# EAGLE board broken-sensor-ctrl (EAGLE 4.16)
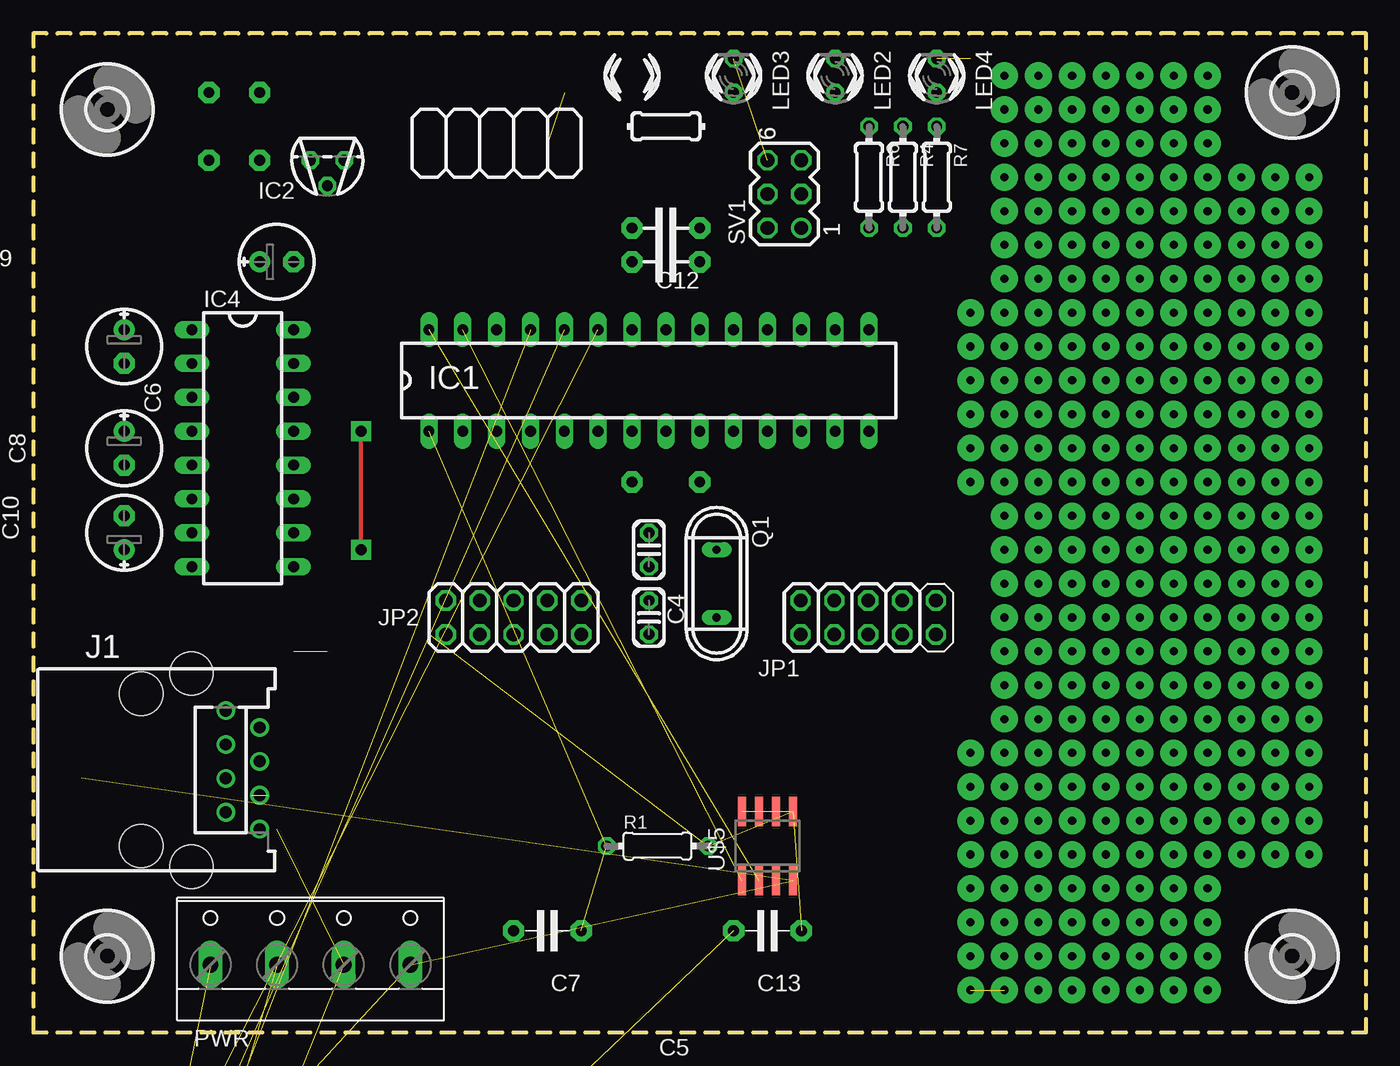
[diagram p0: board, top side]
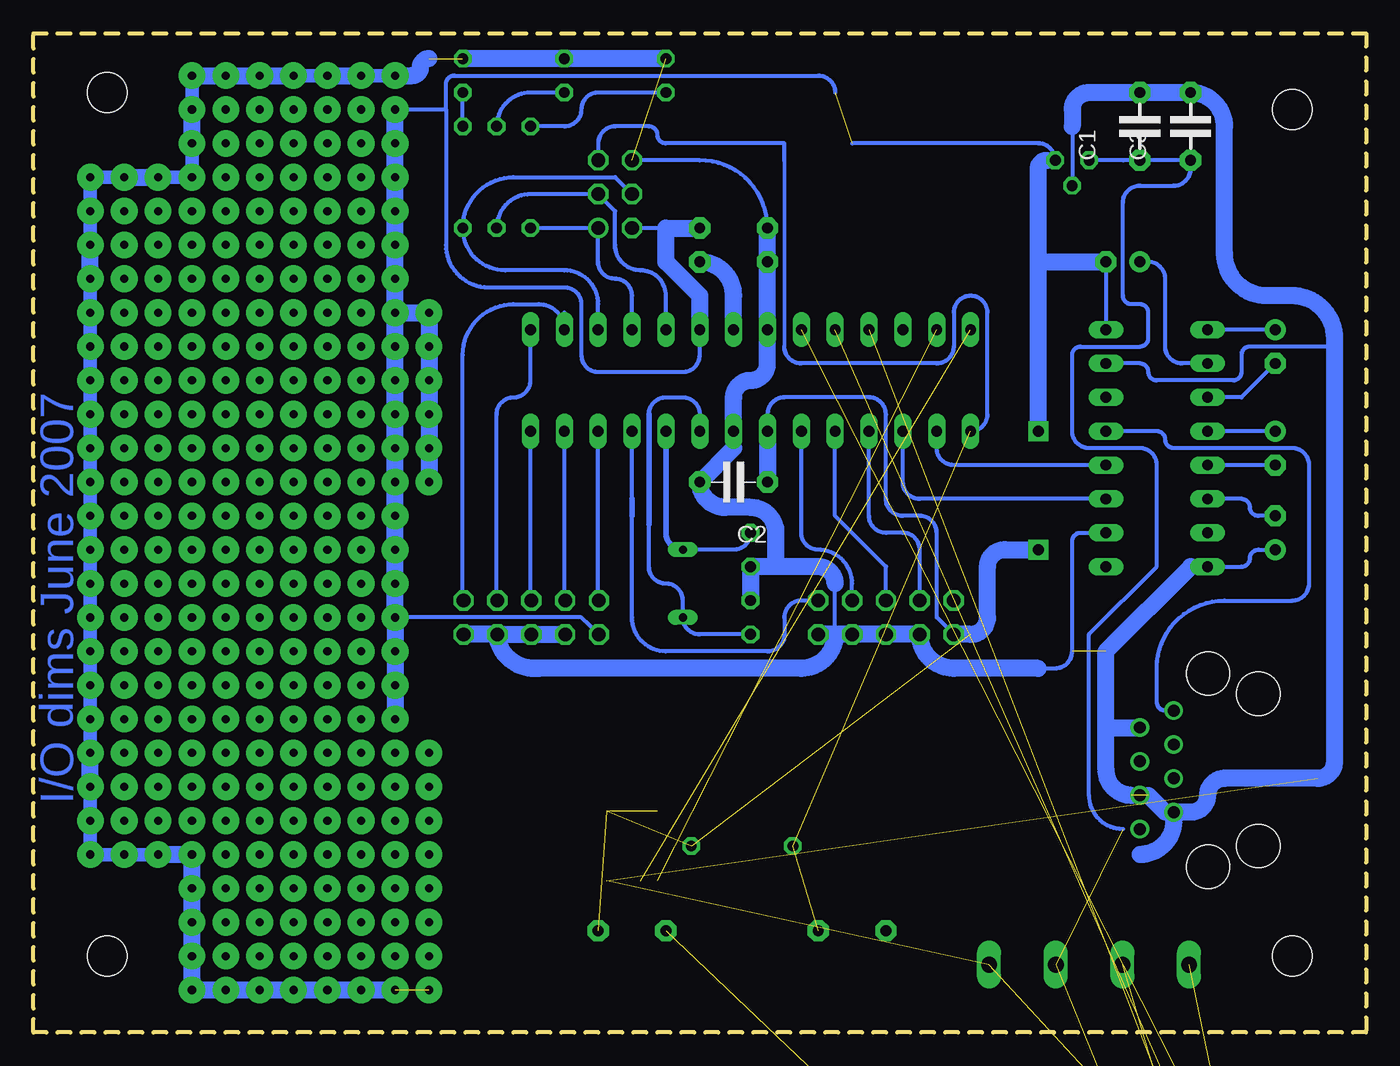
[diagram p1: board, bottom side, seen from below]

Size 100 x 74.92 mm. Coordinates in mm from the lower left corner, seen from the top.
Outline: 0,0 100,0 100,74.92 0,74.92 0,0
Copper layers (1*16): Top 0.035mm / dielectric 1.5mm / Bottom 0.035mm
Design rules "10mils": minimum track width 10mil, minimum drill 24mil, track to track 10mil, track to pad 10mil, pad to pad 10mil, via to via 10mil, smd to smd 10mil, copper to edge 40mil, drill to drill 10mil, minimum pad ring 10mil, minimum via ring 8mil, stop-mask expansion 0mil, vias tented up to drill 0mil, thermal gap 10mil
Holes 3.25 mm at 11.87,26.91 11.87,12.42

## Footprints (pad centres in the part's own frame; a part is rotated, then mirrored left to right if it is on the bottom)
C-5 = drill 0.813 pad 1.6 octagon: 1 -2.54,0; 2 2.54,0
C025-024X044 = drill 0.813 octagon: 1 -1.27,0; 2 1.27,0
E2,5-6E = drill 0.813 pad 1.575 round: + -1.27,0 | drill 0.813 pad 1.575 octagon: - 1.27,0
DIL28-3 = drill 0.813 long: 1 -16.51,-3.81; 2 -13.97,-3.81; 3 -11.43,-3.81; 4 -8.89,-3.81; 5 -6.35,-3.81; 6 -3.81,-3.81; 7 -1.27,-3.81; 8 1.27,-3.81; 9 3.81,-3.81; 10 6.35,-3.81; 11 8.89,-3.81; 12 11.43,-3.81; 13 13.97,-3.81; 14 16.51,-3.81; 15 16.51,3.81; 16 13.97,3.81; 17 11.43,3.81; 18 8.89,3.81; 19 6.35,3.81; 20 3.81,3.81; 21 1.27,3.81; 22 -1.27,3.81; 23 -3.81,3.81; 24 -6.35,3.81; 25 -8.89,3.81; 26 -11.43,3.81; 27 -13.97,3.81; 28 -16.51,3.81
TO92 = drill 0.813 octagon: 1 -1.27,0; 2 0,1.905; 3 1.27,0
DIL16 = drill 0.813 long: 1 -8.89,-3.81; 2 -6.35,-3.81; 3 -3.81,-3.81; 4 -1.27,-3.81; 5 1.27,-3.81; 6 3.81,-3.81; 7 6.35,-3.81; 8 8.89,-3.81; 9 8.89,3.81; 10 6.35,3.81; 11 3.81,3.81; 12 1.27,3.81; 13 -1.27,3.81; 14 -3.81,3.81; 15 -6.35,3.81; 16 -8.89,3.81
215877-4 = drill 0.889 round: 1 -4.445,6.35; 2 -3.175,8.89; 3 -1.905,6.35; 4 -0.635,8.89; 5 0.635,6.35; 6 1.905,8.89; 7 3.175,6.35; 8 4.445,8.89 | hole 3.251: -5.715,0; 5.715,0
2X05 = drill 1.016 octagon: 1 -5.08,-1.27; 2 -5.08,1.27; 3 -2.54,-1.27; 4 -2.54,1.27; 5 0,-1.27; 6 0,1.27; 7 2.54,-1.27; 8 2.54,1.27; 9 5.08,-1.27; 10 5.08,1.27
LED3MM = drill 0.813 octagon: A -1.27,0; K 1.27,0
W237-4 = drill 1.194 long: 1 -7.5,-1.27; 2 -2.5,-1.27; 3 2.5,-1.27; 4 7.5,-1.27
QS = drill 0.61 long: 1 -2.54,0; 2 2.54,0
0204/7 = drill 0.813 octagon: 1 -3.81,0; 2 3.81,0
MA03-2 = drill 1.016 round: 1 -2.54,-1.27 | drill 1.016 octagon: 2 -2.54,1.27; 3 0,-1.27; 4 0,1.27; 5 2.54,-1.27; 6 2.54,1.27
3,0 = hole 3: 0,0
SO8 = smd 0.6 x 2.2: 1 -1.905,-2.6; 2 -0.635,-2.6; 3 0.635,-2.6; 4 1.905,-2.6; 5 1.905,2.6; 6 0.635,2.6; 7 -0.635,2.6; 8 -1.905,2.6

## Placement (x,y rotation side)
C1  100nF  [C-5]  16.98,67.94 90 bottom
C2  100nF  [C-5]  47.46,41.27 180 bottom
C3  10uF  [C-5]  13.17,67.94 90 bottom
C4  12pF  [C025-024X044]  46.19,31.11 270 top
C5  12pF  [C025-024X044]  46.19,36.19 90 top
C6  1uF  [E2,5-6E]  6.82,51.43 270 top
C7  100nF  [C-5]  38.57,7.62 180 top
C8  1uF  [E2,5-6E]  6.82,43.81 270 top
C9  1uF  [E2,5-6E]  18.25,57.78 0 top
C10  1uF  [E2,5-6E]  6.82,37.46 90 top
C11  100nF  [C-5]  47.46,57.78 180 top
C12  100nF  [C-5]  47.46,60.32 180 top
C13  100nF  [C-5]  55.08,7.62 180 top
IC1  ATMEGA88-20P  [DIL28-3]  46.19,48.89 0 top
IC2  78L05Z  [TO92]  22.06,65.4 180 top
IC4  MAX232  [DIL16]  15.71,43.81 270 top
J1  [215877-4]  8.09,19.68 270 top
JP1  [2X05]  62.64,31.11 0 top
JP2  [2X05]  36.03,31.11 0 top
LED2  [LED3MM]  60.16,71.75 90 top
LED3  [LED3MM]  52.54,71.75 90 top
LED4  [LED3MM]  67.78,71.75 90 top
PWR  [W237-4]  20.79,6.34 0 top
Q1  20MHz  [QS]  51.27,33.65 270 top
R1  10k  [0204/7]  46.82,13.97 0 top
R2  2k  [0204/7]  -7.15,-37.47 0 top  (outside the outline)
R3  2k  [0204/7]  -7.15,-45.09 0 top  (outside the outline)
R4  330  [0204/7]  65.24,64.13 270 top
R5  2k  [0204/7]  -7.15,-52.71 0 top  (outside the outline)
R6  330  [0204/7]  62.7,64.13 270 top
R7  330  [0204/7]  67.78,64.13 270 top
R8  10k  [0204/7]  -7.15,-60.33 0 top  (outside the outline)
R9  10k  [0204/7]  -7.15,-67.95 0 top  (outside the outline)
R10  10k  [0204/7]  -7.15,-75.57 0 top  (outside the outline)
SV1  ISP6  [MA03-2]  56.35,62.86 90 top
U$1  [3,0]  5.55,5.71 0 top
U$2  [3,0]  5.55,69.21 0 top
U$3  [3,0]  94.45,70.48 0 top
U$4  [3,0]  94.45,5.71 0 top
U$5  LM75  [SO8]  55.08,13.97 0 top

## Library data of the parts
C1-C3 C7 C11-C13 = discrete
C4-C6 C8-C10 R1-R10 = rcl
IC1 = avr
IC2 = linear
IC4 = maxim
J1 = con-amp
JP1 JP2 = pinhead
LED2-LED4 = led
PWR = con-wago-500
Q1 = special
SV1 = con-lstb
U$1-U$4 = holes
U$5 = lm75

## Nets
+5V: C2.1 C9.- C12.1 C13.1 IC1.7 IC1.20 IC2.1 IC4.16 JP1.1 JP2.1 R1.2 SV1.2 U$5.5 U$5.6 U$5.7 U$5.8
GND: C1.2 C2.2 C3.2 C4.1 C5.1 C10.+ C11.2 C12.2 C13.2 IC1.8 IC1.22 IC2.2 IC4.8 IC4.10 IC4.15 J1.2 J1.7 JP1.3 JP1.5 JP1.7 JP1.9 JP2.3 JP2.5 JP2.7 JP2.9 LED2.K LED3.K LED4.K PWR.4 R2.1 R3.1 R5.1 SV1.6 U$5.4
HMM: IC1.17 R7.2 SV1.4
N$1: C7.1 IC1.1 R1.1 SV1.5
N$2: IC1.19 R4.2 SV1.3
N$3: IC1.18 R6.2 SV1.1
N$4: C5.2 IC1.10 Q1.1
N$5: IC1.2 IC4.12
N$6: IC1.3 IC4.11
N$7: C4.2 IC1.9 Q1.2
N$8: IC1.16 JP1.10
N$10: IC1.15 JP1.8
N$11: IC1.14 JP1.6
N$12: IC1.13 JP1.4
N$13: IC1.12 JP1.2
N$14: IC1.11 JP2.10
N$15: C9.+ IC4.2
N$16: C10.- IC4.6
N$17: C6.+ IC4.1
N$18: IC1.27 U$5.1
N$19: C6.- IC4.3
N$20: C8.- IC4.5
N$21: C8.+ IC4.4
N$22: C11.1 IC1.21
N$23: IC1.6 JP2.8
N$24: IC1.5 JP2.6
N$25: IC1.4 JP2.4
N$26: IC1.28 U$5.2
N$33: IC1.23 R2.2 R8.1
N$34: LED2.A R4.1
N$35: LED3.A R6.1
N$36: LED4.A R7.1
N$38: J1.8
N$65: IC1.24 R3.2 R9.1
N$66: IC1.25 R5.2 R10.1
N$67: C1.1 C3.1 IC2.3 PWR.3 R8.2
N$68: PWR.2 R9.2
N$69: PWR.1 R10.2
RX: IC4.13 J1.1

## Tracks (layer width: path | path; a pad name or v marks a point on that pad's centre or on a via)
+5V  (via drill 0.61 pad 2, 0.81 pad 1.5)  (7 unrouted)
  Top 0.3: v24.6,36.19 v24.6,45.08
  Bottom 0.3: C9.- IC4.16 | v72.86,69.21 69.05,69.21 | JP2.1 32.22,31.11 32.22,37.46 arc-90 33.49,38.73 34.76,38.73 arc90 36.03,40 36.03,46.35 arc-90 37.3,47.62 43.65,47.62 arc-90 44.92,46.35 IC1.7 | IC1.20 50,50.8 arc90 51.27,49.53 57.62,49.53 arc90 58.89,50.8 58.89,54.61 arc-90 60.16,55.88 65.88,55.88 arc90 69.05,59.05 69.05,69.21 | 69.05,69.21 69.05,71.11 arc90 68.41,71.75 41.11,71.75 arc90 39.84,70.48 | 38.57,66.67 24.6,66.67 arc90 IC2.1 23.96,65.4 | JP1.1 58.89,31.11 v72.86,31.11 | 52.54,60.32 SV1.2
  Bottom 1.27: v24.6,45.08 24.6,57.78 | 24.6,57.78 C9.- | IC1.7 C2.1 | v72.86,69.21 v72.86,66.67 v72.86,64.13 v72.86,61.59 v72.86,59.05 v72.86,56.51 v72.86,53.97 | v72.86,53.97 v72.86,51.43 v72.86,48.89 v72.86,46.35 v72.86,43.81 v72.86,41.27 v72.86,38.73 v72.86,36.19 v72.86,33.65 v72.86,31.11 v72.86,28.57 v72.86,26.03 v72.86,23.49 | JP2.1 29.68,29.84 arc-90 28.41,31.11 28.41,34.92 arc90 27.14,36.19 v24.6,36.19 | 23.96,65.4 arc-90 24.6,64.77 24.6,57.78 | v70.32,41.27 v70.32,43.81 v70.32,46.35 v70.32,48.89 v70.32,51.43 v70.32,53.97 v72.86,53.97 | C12.1 52.54,60.32 52.54,57.78 50,55.24 IC1.20
GND  (via drill 0.61 pad 2)  (11 unrouted)
  Bottom 0.3: 22.06,67.94 IC2.2 | J1.7 15.08,16.5 | 13.17,34.92 IC4.8 9.36,34.92 arc-90 8.73,35.55 arc90 8.09,36.19 C10.+ | IC4.15 16.98,50.16 arc90 16.34,49.53 arc-90 15.71,48.89 10,48.89 arc-90 9.36,49.53 9.36,50.8 arc90 8.73,51.43 2.38,51.43 | 39.84,29.84 39.84,33.65 | IC4.10 21.42,37.46 arc-90 22.06,36.83 22.06,28.57 arc90 23.33,27.3 24.6,27.3 | C12.2 arc-90 50,65.4 SV1.6
  Bottom 0.406: JP1.5 62.7,29.84 | 65.24,29.84 JP1.7 | 47.46,43.81 IC1.8
  Bottom 1: v90.64,13.33 v93.18,13.33 v95.72,13.33 v95.72,15.87 v95.72,18.41 | v95.72,59.05 v95.72,61.59 v95.72,64.13 v93.18,64.13 | v95.72,56.51 v95.72,53.97 v95.72,51.43 v95.72,48.89 v95.72,46.35 v95.72,43.81 v95.72,41.27 v95.72,38.73 v95.72,36.19 v95.72,33.65 v95.72,31.11 v95.72,28.57 v95.72,26.03 v95.72,23.49 v95.72,20.95 | v90.64,64.13 v88.1,64.13 v88.1,66.67 | v88.1,69.21 v88.1,71.75 | v75.4,71.75 v72.86,71.75 | v80.48,71.75 v77.94,71.75
  Bottom 1.27: 39.84,29.84 JP2.7 JP2.5 JP2.3 arc-90 30.95,27.3 24.6,27.3 | 39.84,29.84 JP2.9 | 65.24,29.84 JP1.9 | LED3.K LED2.K LED4.K | C12.2 C11.2 IC1.22 44.92,50.16 arc90 46.19,48.89 arc-90 47.46,47.62 IC1.8 | v72.86,71.75 71.59,71.75 arc-90 70.95,72.38 arc90 70.32,73.02 | C4.1 C5.1 44.28,34.92 | v77.94,71.75 v75.4,71.75 | v88.1,66.67 v88.1,69.21 | v90.64,13.33 v88.1,13.33 v88.1,10.79 v88.1,8.25 v88.1,5.71 v88.1,3.17 v85.56,3.17 v83.02,3.17 v80.48,3.17 v77.94,3.17 v75.4,3.17 v72.86,3.17 | v95.72,18.41 v95.72,20.95 | v95.72,56.51 v95.72,59.05 | v93.18,64.13 v90.64,64.13 | v80.48,71.75 v83.02,71.75 v85.56,71.75 v88.1,71.75 | 15.08,16.5 16.34,17.77 | 13.17,34.92 19.52,28.57 19.52,22.86 | 19.52,22.86 J1.2 | 39.84,33.65 arc-90 41.11,34.92 44.28,34.92 | 22.06,67.94 22.06,69.21 arc90 20.79,70.48 C1.2 C3.2 arc90 10.63,67.94 10.63,58.41 arc-90 7.46,55.24 5.55,55.24 arc90 2.38,52.07 2.38,51.43 2.38,20.31 arc90 3.64,19.04 10.63,19.04 arc-90 11.9,17.77 arc90 13.17,16.5 J1.7 14.44,15.87 arc90 16.98,13.33 | 17.61,17.77 arc90 19.52,19.68 19.52,22.86 | 39.84,29.84 arc90 42.38,27.3 62.06,27.3 arc90 65.24,29.84 | JP1.3 JP1.5 65.24,29.84 | 44.28,34.92 44.28,37.46 arc-90 46.19,39.37 48.09,39.37 arc90 C2.2 47.46,43.81
  other vias: 70.32,3.17
HMM
  Bottom 0.3: SV1.4 56.35,64.13 63.97,64.13 arc-90 R7.2 arc-90 64.61,57.15 60.16,57.15 arc90 57.62,54.61 IC1.17
N$1  (2 unrouted)
  Bottom 0.254: 43.65,51.43 43.65,65.4
  Bottom 0.3: 43.65,65.4 43.65,66.67 52.54,66.67 arc90 53.17,67.3 arc-90 53.81,67.94 56.35,67.94 arc-90 57.62,66.67 SV1.5 | 43.65,51.43 arc-90 42.38,50.16 32.22,50.16 arc-90 30.95,51.43 30.95,53.97 arc90 29.68,55.24 arc90 28.41,53.97 28.41,46.35 arc90 IC1.1
N$2
  Bottom 0.3: IC1.19 52.54,55.24 arc-90 54.45,57.15 arc90 56.35,59.05 56.35,61.59 SV1.3 62.7,62.86 arc-90 R4.2
N$3
  Bottom 0.3: R6.2 SV1.1 57.62,57.78 arc-90 56.35,56.51 arc90 55.08,55.24 IC1.18
N$4
  Bottom 0.3: Q1.1 47.46,36.19 arc-90 C5.2
  Bottom 0.406: IC1.10 52.54,37.46 arc-90 Q1.1
N$5
  Bottom 0.3: IC4.12 30.95,42.54 arc90 32.22,43.81 IC1.2
N$6
  Bottom 0.3: IC4.11 33.49,40 arc90 34.76,41.27 IC1.3
N$7
  Bottom 0.3: C4.2 50,29.84 arc90 Q1.2 51.27,32.38 arc-90 52.54,33.65 arc90 53.81,34.92 53.81,38.1 | IC1.9 50,46.35 arc-90 51.27,47.62 52.54,47.62 arc-90 53.81,46.35
  Bottom 0.406: 53.81,38.1 53.81,46.35
N$8
  Bottom 0.3: 60.16,53.97 IC1.16 arc-90 62.06,54.61 63.97,54.61 arc-90 67.78,50.8 67.78,32.38
  Bottom 0.406: JP1.10 67.78,32.38
N$9  (via drill 0.61 pad 2)
  other vias: 80.48,31.11
N$10
  Bottom 0.3: JP1.8 65.24,32.38 65.24,46.35 arc90 63.97,47.62 arc-90 62.7,48.89 IC1.15
N$11
  Bottom 0.3: JP1.6 62.7,32.38 IC1.14
N$12
  Bottom 0.3: JP1.4 60.16,32.38 IC1.13
N$13
  Bottom 0.3: JP1.2 57.62,32.38 IC1.12
N$14
  Bottom 0.3: JP2.10 42.38,32.38 arc-90 43.65,31.11 43.65,29.84 arc90 44.92,28.57 52.54,28.57 arc90 55.08,31.11 55.08,38.73 | 55.08,40 IC1.11
  Bottom 0.406: 55.08,38.73 55.08,40
N$15
  Bottom 0.3: IC4.2 13.81,50.16 arc90 15.08,51.43 15.08,56.51 arc-90 16.34,57.78 C9.+
N$16
  Bottom 0.3: C10.- 8.09,38.73 arc90 8.73,39.37 arc-90 9.36,40 IC4.6
N$17
  Bottom 0.3: C6.+ IC4.1
N$18  (1 unrouted)
N$19
  Bottom 0.3: IC4.3 9.36,47.62 C6.-
N$20
  Bottom 0.3: C8.- IC4.5
N$21
  Bottom 0.3: C8.+ IC4.4
N$22
  Bottom 1.27: C11.1 arc90 47.46,55.24 IC1.21
N$23
  Bottom 0.3: IC1.6 42.38,37.46 arc-90 41.11,36.19 arc90 38.57,33.65 JP2.8
N$24
  Bottom 0.3: JP2.6 36.03,34.92 39.84,38.73 IC1.5
N$25
  Bottom 0.3: IC1.4 37.3,38.73 arc-90 36.03,37.46 34.76,37.46 arc90 33.49,36.19 JP2.4
N$26  (1 unrouted)
N$32  (via drill 0.61 pad 2)
  other vias: 80.48,61.59
N$33  (2 unrouted)
N$34
  Bottom 0.3: LED2.A 62.7,70.48 arc-90 R4.1
N$35
  Bottom 0.3: R6.1 60.16,67.94 arc-90 58.89,69.21 arc90 57.62,70.48 LED3.A
N$36
  Bottom 0.3: R7.1 LED4.A
N$39  (via drill 0.61 pad 2)
  other vias: 80.48,33.65
N$40  (via drill 0.61 pad 2)
  other vias: 80.48,36.19
N$41  (via drill 0.61 pad 2)
  other vias: 80.48,38.73
N$42  (via drill 0.61 pad 2)
  other vias: 90.64,15.87
N$43  (via drill 0.61 pad 2)
  other vias: 93.18,15.87
N$44  (via drill 0.61 pad 2)
  other vias: 90.64,18.41
N$45  (via drill 0.61 pad 2)
  other vias: 93.18,18.41
N$46  (via drill 0.61 pad 2)
  other vias: 83.02,66.67
N$47  (via drill 0.61 pad 2)
  other vias: 80.48,41.27
N$48  (via drill 0.61 pad 2)
  other vias: 75.4,66.67
N$49  (via drill 0.61 pad 2)
  other vias: 77.94,66.67
N$50  (via drill 0.61 pad 2)
  other vias: 80.48,66.67
N$51  (via drill 0.61 pad 2)
  other vias: 80.48,69.21
N$52  (via drill 0.61 pad 2)
  other vias: 77.94,69.21
N$53  (via drill 0.61 pad 2)
  other vias: 75.4,69.21
N$54  (via drill 0.61 pad 2)
  other vias: 83.02,61.59
N$55  (via drill 0.61 pad 2)
  other vias: 80.48,43.81
N$56  (via drill 0.61 pad 2)
  other vias: 80.48,46.35
N$57  (via drill 0.61 pad 2)
  other vias: 77.94,64.13
N$58  (via drill 0.61 pad 2)
  other vias: 80.48,64.13
N$59  (via drill 0.61 pad 2)
  other vias: 83.02,64.13
N$60  (via drill 0.61 pad 2)
  other vias: 83.02,33.65
N$61  (via drill 0.61 pad 2)
  other vias: 83.02,36.19
N$62  (via drill 0.61 pad 2)
  other vias: 83.02,38.73
N$63  (via drill 0.61 pad 2)
  other vias: 83.02,41.27
N$64  (via drill 0.61 pad 2)
  other vias: 83.02,43.81
N$65  (2 unrouted)
N$66  (2 unrouted)
N$67  (2 unrouted)
  Bottom 0.3: C1.1 C3.1 13.17,64.77 arc90 14.44,63.5 16.98,63.5 arc-90 18.25,62.23 18.25,55.24 arc-90 17.61,54.61 16.98,54.61 arc90 16.34,53.97 16.34,52.07 arc90 16.98,51.43 21.42,51.43 arc-90 22.06,50.8 22.06,45.08 arc-90 20.79,43.81 16.98,43.81 arc90 15.71,42.54 15.71,34.92 20.79,29.84 20.79,17.77 arc-90 18.25,15.24 | C1.1 18.25,65.4 | C1.1 IC2.3
N$68  (1 unrouted)
N$69  (1 unrouted)
N$70  (via drill 0.61 pad 2)
  other vias: 80.48,48.89
N$71  (via drill 0.61 pad 2)
  other vias: 83.02,46.35
N$72  (via drill 0.61 pad 2)
  other vias: 83.02,48.89
N$73  (via drill 0.61 pad 2)
  other vias: 80.48,51.43
N$79  (via drill 0.61 pad 2)
  other vias: 80.48,53.97
N$80  (via drill 0.61 pad 2)
  other vias: 80.48,56.51
N$86  (via drill 0.61 pad 2)
  other vias: 80.48,59.05
N$87  (via drill 0.61 pad 2)
  other vias: 77.94,31.11
N$93  (via drill 0.61 pad 2)
  other vias: 77.94,61.59
N$94  (via drill 0.61 pad 2)
  other vias: 77.94,33.65
N$100  (via drill 0.61 pad 2)
  other vias: 77.94,36.19
N$101  (via drill 0.61 pad 2)
  other vias: 77.94,38.73
N$107  (via drill 0.61 pad 2)
  other vias: 77.94,41.27
N$108  (via drill 0.61 pad 2)
  other vias: 77.94,43.81
N$114  (via drill 0.61 pad 2)
  other vias: 77.94,46.35
N$115  (via drill 0.61 pad 2)
  other vias: 77.94,48.89
N$121  (via drill 0.61 pad 2)
  other vias: 77.94,51.43
N$122  (via drill 0.61 pad 2)
  other vias: 77.94,53.97
N$128  (via drill 0.61 pad 2)
  other vias: 77.94,56.51
N$129  (via drill 0.61 pad 2)
  other vias: 77.94,59.05
N$135  (via drill 0.61 pad 2)
  other vias: 75.4,31.11
N$136  (via drill 0.61 pad 2)
  other vias: 75.4,61.59
N$142  (via drill 0.61 pad 2)
  other vias: 75.4,33.65
N$143  (via drill 0.61 pad 2)
  other vias: 75.4,36.19
N$149  (via drill 0.61 pad 2)
  other vias: 75.4,38.73
N$150  (via drill 0.61 pad 2)
  other vias: 75.4,41.27
N$156  (via drill 0.61 pad 2)
  other vias: 75.4,43.81
N$157  (via drill 0.61 pad 2)
  other vias: 75.4,46.35
N$163  (via drill 0.61 pad 2)
  other vias: 75.4,48.89
N$164  (via drill 0.61 pad 2)
  other vias: 75.4,51.43
N$170  (via drill 0.61 pad 2)
  other vias: 75.4,53.97
N$171  (via drill 0.61 pad 2)
  other vias: 75.4,56.51
N$177  (via drill 0.61 pad 2)
  other vias: 75.4,59.05
N$178  (via drill 0.61 pad 2)
  other vias: 75.4,23.49
N$184  (via drill 0.61 pad 2)
  other vias: 75.4,26.03
N$185  (via drill 0.61 pad 2)
  other vias: 75.4,28.57
N$186  (via drill 0.61 pad 2)
  other vias: 70.32,15.87
N$187  (via drill 0.61 pad 2)
  other vias: 70.32,13.33
N$188  (via drill 0.61 pad 2)
  other vias: 70.32,10.79
N$189  (via drill 0.61 pad 2)
  other vias: 70.32,8.25
N$190  (via drill 0.61 pad 2)
  other vias: 70.32,5.71
N$193  (via drill 0.61 pad 2)
  other vias: 72.86,15.87
N$194  (via drill 0.61 pad 2)
  other vias: 72.86,13.33
N$195  (via drill 0.61 pad 2)
  other vias: 72.86,10.79
N$196  (via drill 0.61 pad 2)
  other vias: 72.86,8.25
N$197  (via drill 0.61 pad 2)
  other vias: 72.86,5.71
N$199  (via drill 0.61 pad 2)
  other vias: 83.02,51.43
N$200  (via drill 0.61 pad 2)
  other vias: 75.4,15.87
N$201  (via drill 0.61 pad 2)
  other vias: 75.4,13.33
N$202  (via drill 0.61 pad 2)
  other vias: 75.4,10.79
N$203  (via drill 0.61 pad 2)
  other vias: 75.4,8.25
N$204  (via drill 0.61 pad 2)
  other vias: 75.4,5.71
N$206  (via drill 0.61 pad 2)
  other vias: 77.94,18.41
N$207  (via drill 0.61 pad 2)
  other vias: 77.94,15.87
N$208  (via drill 0.61 pad 2)
  other vias: 77.94,13.33
N$209  (via drill 0.61 pad 2)
  other vias: 77.94,10.79
N$210  (via drill 0.61 pad 2)
  other vias: 77.94,8.25
N$211  (via drill 0.61 pad 2)
  other vias: 77.94,5.71
N$213  (via drill 0.61 pad 2)
  other vias: 80.48,18.41
N$214  (via drill 0.61 pad 2)
  other vias: 80.48,15.87
N$215  (via drill 0.61 pad 2)
  other vias: 80.48,13.33
N$216  (via drill 0.61 pad 2)
  other vias: 80.48,10.79
N$217  (via drill 0.61 pad 2)
  other vias: 80.48,8.25
N$218  (via drill 0.61 pad 2)
  other vias: 80.48,5.71
N$220  (via drill 0.61 pad 2)
  other vias: 83.02,18.41
N$221  (via drill 0.61 pad 2)
  other vias: 83.02,15.87
N$222  (via drill 0.61 pad 2)
  other vias: 83.02,13.33
N$223  (via drill 0.61 pad 2)
  other vias: 83.02,10.79
N$224  (via drill 0.61 pad 2)
  other vias: 83.02,8.25
N$225  (via drill 0.61 pad 2)
  other vias: 83.02,5.71
N$227  (via drill 0.61 pad 2)
  other vias: 85.56,18.41
N$228  (via drill 0.61 pad 2)
  other vias: 85.56,15.87
N$229  (via drill 0.61 pad 2)
  other vias: 85.56,13.33
N$230  (via drill 0.61 pad 2)
  other vias: 85.56,10.79
N$231  (via drill 0.61 pad 2)
  other vias: 85.56,8.25
N$232  (via drill 0.61 pad 2)
  other vias: 85.56,5.71
N$234  (via drill 0.61 pad 2)
  other vias: 88.1,18.41
N$235  (via drill 0.61 pad 2)
  other vias: 88.1,15.87
N$236  (via drill 0.61 pad 2)
  other vias: 83.02,53.97
N$237  (via drill 0.61 pad 2)
  other vias: 83.02,56.51
N$240  (via drill 0.61 pad 2)
  other vias: 83.02,59.05
N$245  (via drill 0.61 pad 2)
  other vias: 77.94,20.95
N$246  (via drill 0.61 pad 2)
  other vias: 80.48,20.95
N$247  (via drill 0.61 pad 2)
  other vias: 83.02,20.95
N$248  (via drill 0.61 pad 2)
  other vias: 85.56,20.95
N$249  (via drill 0.61 pad 2)
  other vias: 88.1,20.95
N$250  (via drill 0.61 pad 2)
  other vias: 90.64,20.95
N$251  (via drill 0.61 pad 2)
  other vias: 93.18,20.95
N$253  (via drill 0.61 pad 2)
  other vias: 77.94,23.49
N$254  (via drill 0.61 pad 2)
  other vias: 80.48,23.49
N$255  (via drill 0.61 pad 2)
  other vias: 83.02,23.49
N$256  (via drill 0.61 pad 2)
  other vias: 85.56,23.49
N$257  (via drill 0.61 pad 2)
  other vias: 88.1,23.49
N$258  (via drill 0.61 pad 2)
  other vias: 90.64,23.49
N$259  (via drill 0.61 pad 2)
  other vias: 93.18,23.49
N$261  (via drill 0.61 pad 2)
  other vias: 77.94,26.03
N$262  (via drill 0.61 pad 2)
  other vias: 80.48,26.03
N$263  (via drill 0.61 pad 2)
  other vias: 83.02,26.03
N$264  (via drill 0.61 pad 2)
  other vias: 85.56,26.03
N$265  (via drill 0.61 pad 2)
  other vias: 88.1,26.03
N$266  (via drill 0.61 pad 2)
  other vias: 90.64,26.03
N$267  (via drill 0.61 pad 2)
  other vias: 93.18,26.03
N$269  (via drill 0.61 pad 2)
  other vias: 77.94,28.57
N$270  (via drill 0.61 pad 2)
  other vias: 80.48,28.57
N$271  (via drill 0.61 pad 2)
  other vias: 83.02,28.57
N$272  (via drill 0.61 pad 2)
  other vias: 85.56,28.57
N$273  (via drill 0.61 pad 2)
  other vias: 88.1,28.57
N$274  (via drill 0.61 pad 2)
  other vias: 90.64,28.57
N$275  (via drill 0.61 pad 2)
  other vias: 93.18,28.57
N$278  (via drill 0.61 pad 2)
  other vias: 83.02,31.11
N$280  (via drill 0.61 pad 2)
  other vias: 85.56,31.11
N$281  (via drill 0.61 pad 2)
  other vias: 88.1,31.11
N$282  (via drill 0.61 pad 2)
  other vias: 90.64,31.11
N$283  (via drill 0.61 pad 2)
  other vias: 93.18,31.11
N$292  (via drill 0.61 pad 2)
  other vias: 85.56,33.65
N$293  (via drill 0.61 pad 2)
  other vias: 85.56,36.19
N$294  (via drill 0.61 pad 2)
  other vias: 85.56,38.73
N$295  (via drill 0.61 pad 2)
  other vias: 85.56,41.27
N$296  (via drill 0.61 pad 2)
  other vias: 85.56,43.81
N$297  (via drill 0.61 pad 2)
  other vias: 85.56,46.35
N$298  (via drill 0.61 pad 2)
  other vias: 85.56,48.89
N$299  (via drill 0.61 pad 2)
  other vias: 85.56,51.43
N$300  (via drill 0.61 pad 2)
  other vias: 88.1,33.65
N$301  (via drill 0.61 pad 2)
  other vias: 88.1,36.19
N$302  (via drill 0.61 pad 2)
  other vias: 88.1,38.73
N$303  (via drill 0.61 pad 2)
  other vias: 88.1,41.27
N$304  (via drill 0.61 pad 2)
  other vias: 88.1,43.81
N$305  (via drill 0.61 pad 2)
  other vias: 88.1,46.35
N$306  (via drill 0.61 pad 2)
  other vias: 88.1,48.89
N$307  (via drill 0.61 pad 2)
  other vias: 88.1,51.43
N$308  (via drill 0.61 pad 2)
  other vias: 90.64,33.65
N$309  (via drill 0.61 pad 2)
  other vias: 90.64,36.19
N$310  (via drill 0.61 pad 2)
  other vias: 90.64,38.73
N$311  (via drill 0.61 pad 2)
  other vias: 90.64,41.27
N$312  (via drill 0.61 pad 2)
  other vias: 90.64,43.81
N$313  (via drill 0.61 pad 2)
  other vias: 90.64,46.35
N$314  (via drill 0.61 pad 2)
  other vias: 90.64,48.89
N$315  (via drill 0.61 pad 2)
  other vias: 90.64,51.43
N$316  (via drill 0.61 pad 2)
  other vias: 93.18,33.65
N$317  (via drill 0.61 pad 2)
  other vias: 93.18,36.19
N$318  (via drill 0.61 pad 2)
  other vias: 93.18,38.73
N$319  (via drill 0.61 pad 2)
  other vias: 93.18,41.27
N$320  (via drill 0.61 pad 2)
  other vias: 93.18,43.81
N$321  (via drill 0.61 pad 2)
  other vias: 93.18,46.35
N$322  (via drill 0.61 pad 2)
  other vias: 93.18,48.89
N$323  (via drill 0.61 pad 2)
  other vias: 93.18,51.43
N$325  (via drill 0.61 pad 2)
  other vias: 85.56,53.97
N$326  (via drill 0.61 pad 2)
  other vias: 88.1,53.97
N$327  (via drill 0.61 pad 2)
  other vias: 90.64,53.97
N$328  (via drill 0.61 pad 2)
  other vias: 93.18,53.97
N$329  (via drill 0.61 pad 2)
  other vias: 93.18,56.51
N$330  (via drill 0.61 pad 2)
  other vias: 93.18,59.05
N$331  (via drill 0.61 pad 2)
  other vias: 93.18,61.59
N$332  (via drill 0.61 pad 2)
  other vias: 90.64,61.59
N$333  (via drill 0.61 pad 2)
  other vias: 90.64,59.05
N$334  (via drill 0.61 pad 2)
  other vias: 90.64,56.51
N$335  (via drill 0.61 pad 2)
  other vias: 88.1,56.51
N$336  (via drill 0.61 pad 2)
  other vias: 85.56,56.51
N$339  (via drill 0.61 pad 2)
  other vias: 85.56,59.05
N$340  (via drill 0.61 pad 2)
  other vias: 88.1,59.05
N$341  (via drill 0.61 pad 2)
  other vias: 88.1,61.59
N$342  (via drill 0.61 pad 2)
  other vias: 85.56,61.59
N$343  (via drill 0.61 pad 2)
  other vias: 85.56,64.13
N$344  (via drill 0.61 pad 2)
  other vias: 85.56,66.67
N$345  (via drill 0.61 pad 2)
  other vias: 85.56,69.21
N$346  (via drill 0.61 pad 2)
  other vias: 83.02,69.21
N$349  (via drill 0.61 pad 2)
  other vias: 75.4,64.13
N$381  (via drill 0.61 pad 2)
  other vias: 70.32,20.95
N$382  (via drill 0.61 pad 2)
  other vias: 70.32,18.41
N$383  (via drill 0.61 pad 2)
  other vias: 72.86,20.95
N$384  (via drill 0.61 pad 2)
  other vias: 72.86,18.41
N$385  (via drill 0.61 pad 2)
  other vias: 75.4,20.95
N$386  (via drill 0.61 pad 2)
  other vias: 75.4,18.41
RX
  Bottom 0.3: IC4.13 15.71,45.08 arc90 15.08,44.45 arc-90 14.44,43.81 5.55,43.81 arc90 4.28,42.54 4.28,33.65 arc90 5.55,32.38 10.63,32.38 arc-90 15.71,27.3 15.71,24.76 arc-90 15.08,24.12 J1.1

## Text on the board
Bottom: I/O dims June 2007
tOrigins: +5V | GND | I/O dims June 2007 | +5V | GND
tNames: 6 | 1